# Altium PCB currentmode_buck.PCBDOC
Units mm, origin at the board's own origin, x right, y up, seen from the top; angles counter-clockwise.
Board outline 59.7 x 56.7 mm, 2 copper layers (TopLayer, BottomLayer); 40 components, 21 nets, 107 pads, 0 vias.
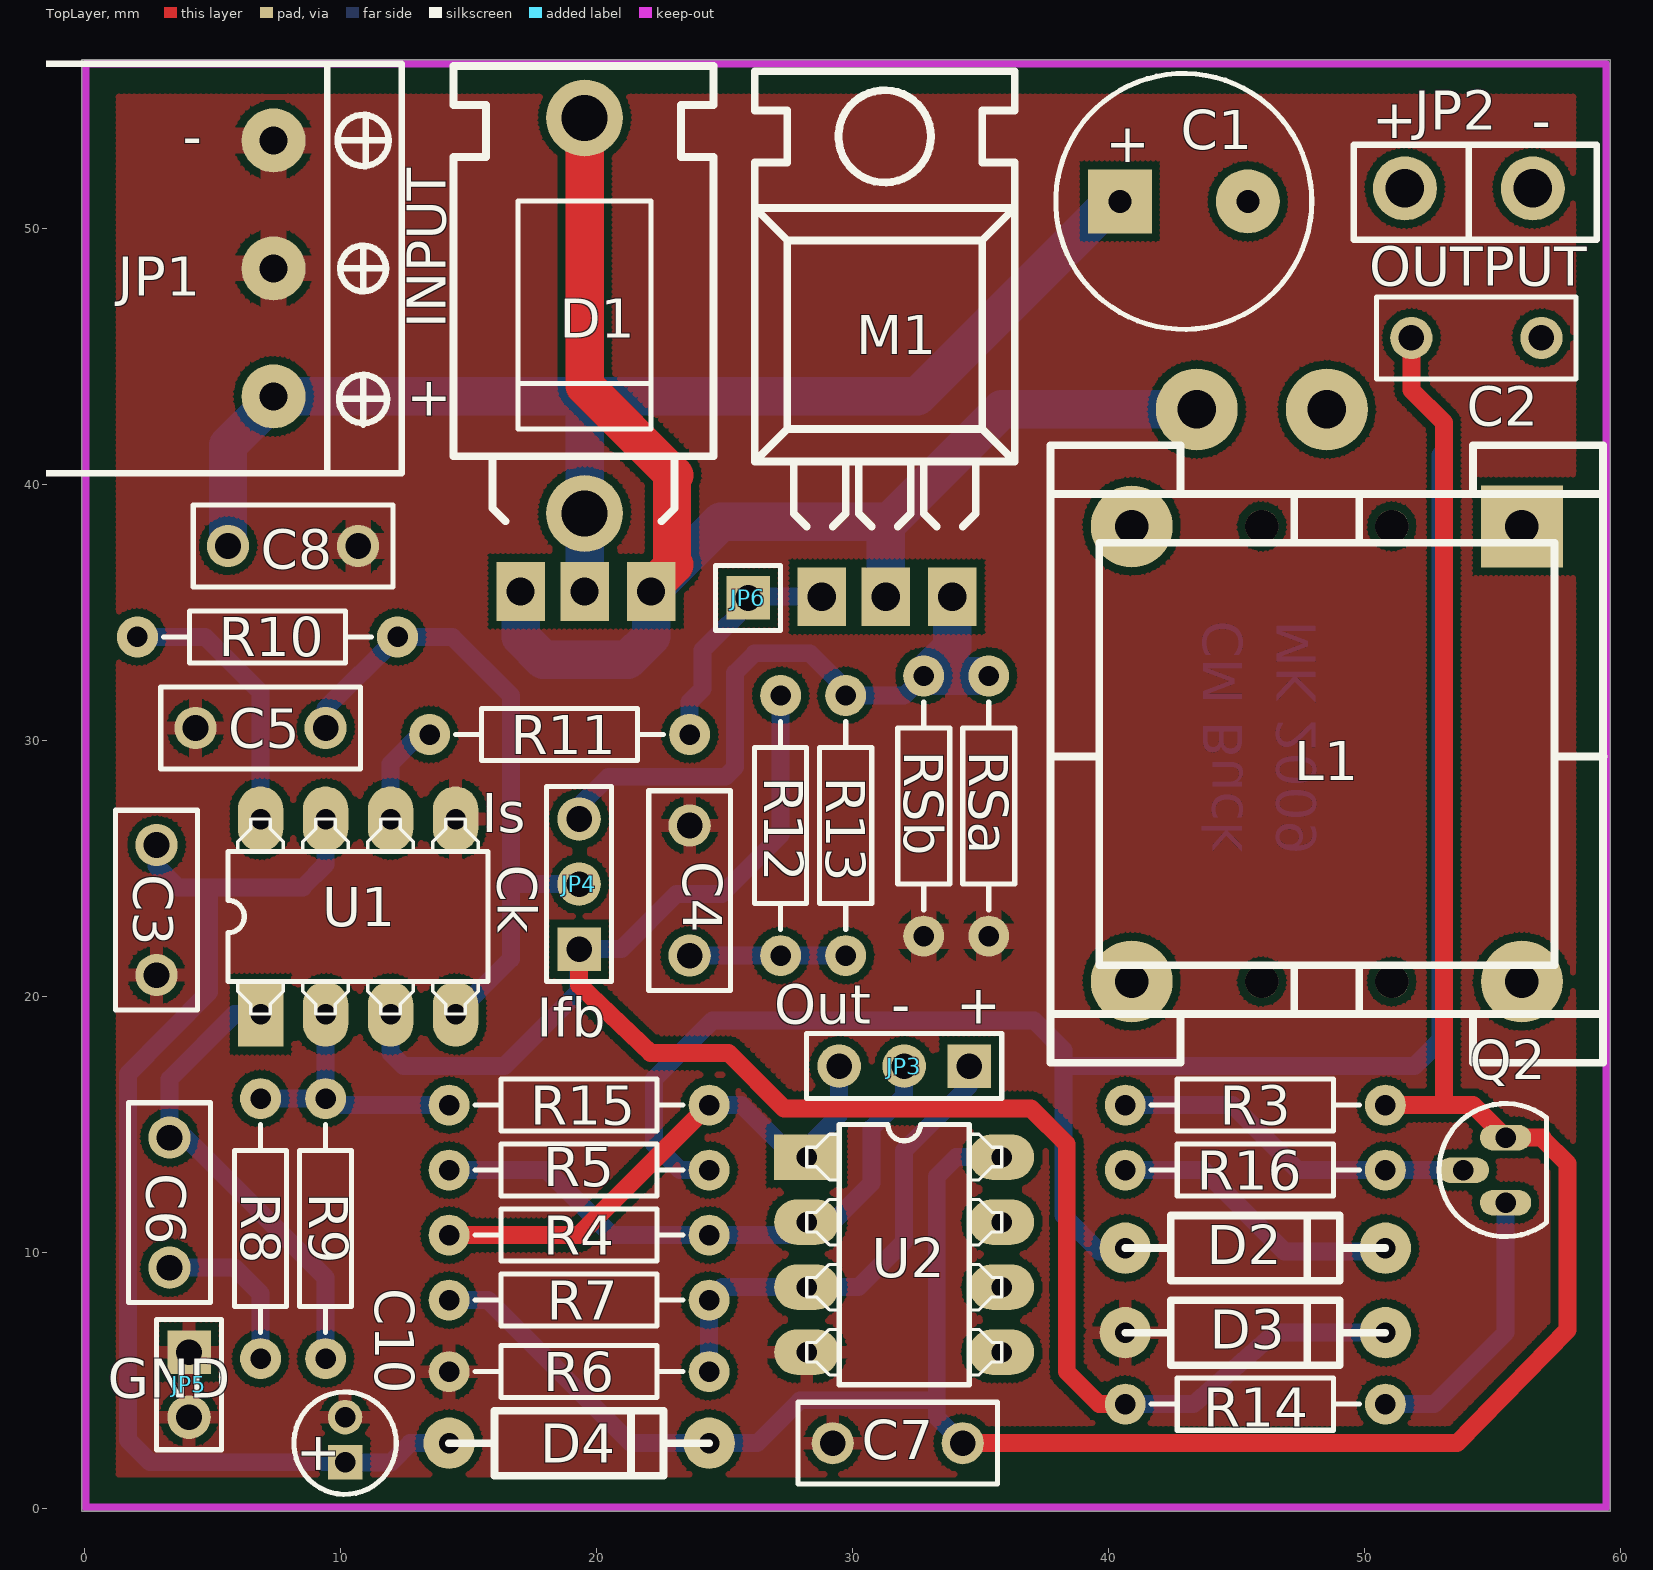
[diagram p0: TopLayer view]
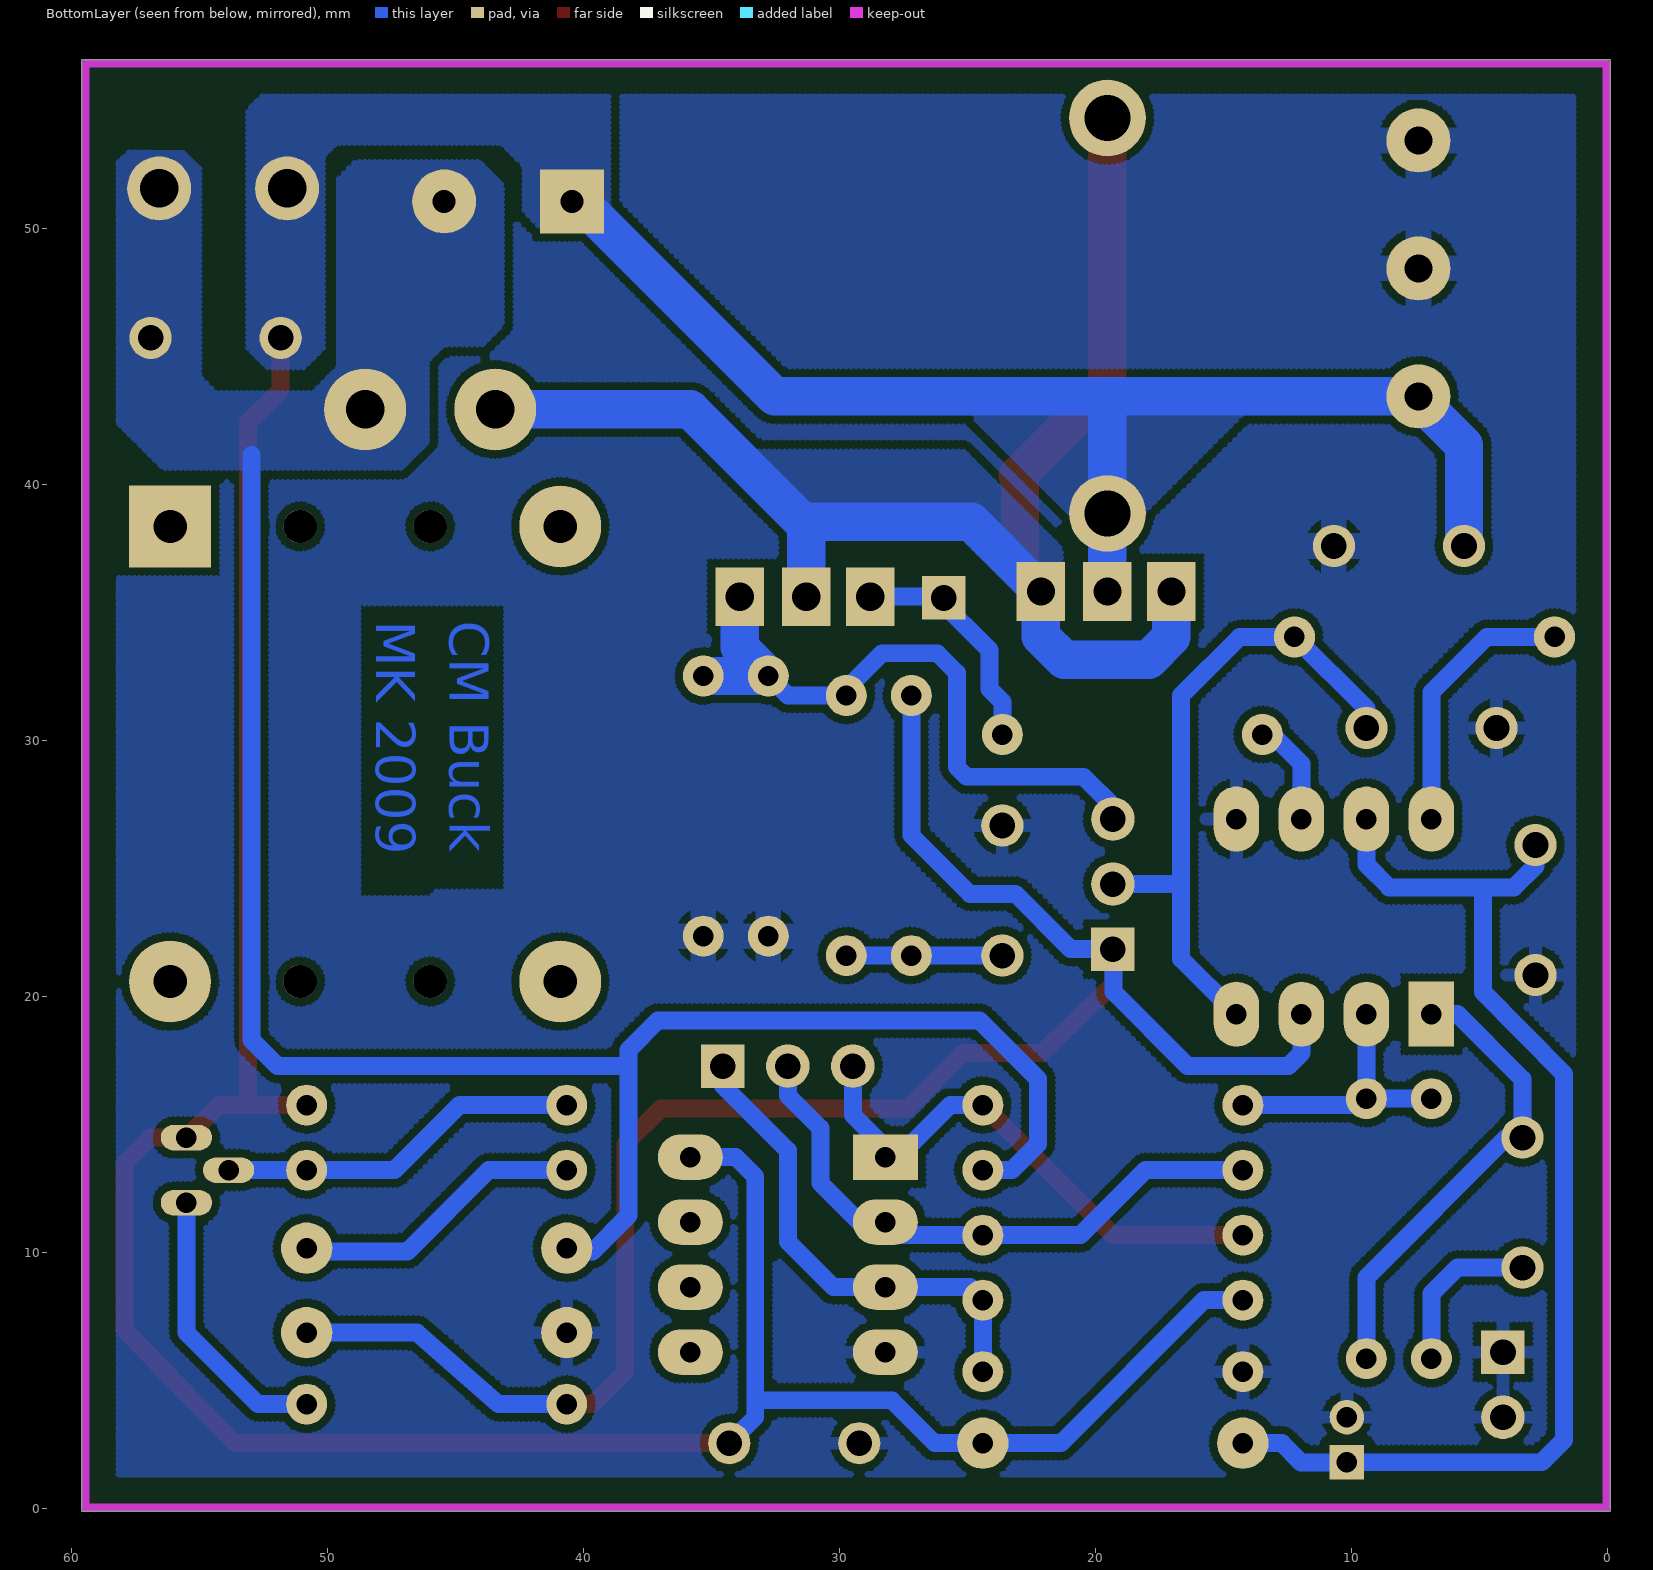
[diagram p1: BottomLayer view, seen from below]

## Layer stack, top to bottom
TopSolder: solder mask 0.0102, Solder Resist, Dk 3.5
TopLayer: signal copper 0.0356
Dielectric1: core 0.32, FR-4, Dk 4.8
BottomLayer: signal copper 0.0356
BottomSolder: solder mask 0.0102, Solder Resist, Dk 3.5

## Board outline
-0.12,-0.12 59.58,-0.12 59.58,56.58 -0.12,56.58

## Design rules (kind name [scope] priority, off if disabled: settings)
Clearance Edge_Clearance [OnLayer('KeepOutLayer') vs (OnLayer('BottomLayer') OR OnLayer('TopLayer'))] p1: gap=1.016 ignorepadtopadclearanceinfootprint=FALSE except(0: Arc-Hole Track-Hole SMDPad-Hole THPad-Hole Via-Hole Fill-Hole Poly-Hole Region-Hole Text-Hole)
Clearance [All] p2: gap=0.305 ignorepadtopadclearanceinfootprint=FALSE except(0: Arc-Hole Track-Hole SMDPad-Hole THPad-Hole Via-Hole Fill-Hole Poly-Hole Region-Hole Text-Hole)
FabricationTestPointUsage TestPointUsage [All] p1: valid=0 allowmultiple=FALSE
FabricationTestpoint Testpoint [All] p1: side=3 testpointundercomponent=TRUE minsize=1.016 maxsize=2.54 preferedsize=1.524 minholesize=0.508 maxholesize=1.016 preferedholesize=0.813 testpointgrid=0.025 allowsidetop=TRUE allowsidebottom=TRUE usegrid=TRUE gridtolerance=0
PolygonConnect DirectConnects [InNet('VOUT') OR InNet('VOUTGND') or InNet(NetD1_A)] p1: connectstyle=Direct reliefconductorwidth=0.254 reliefentries=4 polygonreliefangle="90 Angle" airgapwidth=0.254
PolygonConnect ThickThermals [(InComponent('JP1') OR InComponent('JP2') OR InComponent('C1') OR InComponent('C2') OR InComponent('C8') OR InComponent('RSa') OR InComponent('RSb'))] p2: connectstyle=Relief reliefconductorwidth=1 reliefentries=4 polygonreliefangle="90 Angle" airgapwidth=0.254
PolygonConnect [All] p3: connectstyle=Relief reliefconductorwidth=0.5 reliefentries=4 polygonreliefangle="90 Angle" airgapwidth=0.254
RoutingVias [All] p1: holewidth=0.711 width=1.27 viastyle="Through Hole" minholewidth=0.711 minwidth=1.27 maxholewidth=0.711 maxwidth=1.27
SilkToSolderMaskClearance SilkscreenOverComponentPads [IsPad] p1: minsilkscreentomaskgap=0.254 clearancetoexposedcopper=TRUE
SolderMaskExpansion [All] p1: expansion=0.102 istentingtop=FALSE
Width [All] p1: maxlimit=1.75 minlimit=0.25 preferedwidth=0.7
27 further rules are at their usual default settings.

## Components (designator, comment, footprint, x,y, rotation, side; value= is the part's Value field where it differs from the comment)
C1 "Cap Pol2" CAPPR5-5X5 42.926,51.054 r0 top value=C
C2 "Cap" CAPR5.08-7.8X3.2 54.356,45.72 r180 top value=C
C3 "Cap" CAPR5.08-7.8X3.2 2.794,23.368 r90 top value=100nF
C4 "Cap" CAPR5.08-7.8X3.2 23.622,24.13 r270 top value=C
C5 "Cap" CAPR5.08-7.8X3.2 6.858,30.48 r0 top value=C
C6 "Cap" CAPR5.08-7.8X3.2 3.302,11.938 r90 top value=C
C7 "Cap" CAPR5.08-7.8X3.2 31.75,2.54 r0 top value=100nF
C8 "Cap" CAPR5.08-7.8X3.2 8.128,37.592 r180 top value=100nF
C10 "Cap Pol1" CAPPR1.5-4X5 10.16,2.54 r90 top value=1uF
D1 "D" TO220_DIODE_COMB 17.018,35.814 r0 top
D2 "Vz" DIODE0.4 40.64,10.16 r0 top
D3 "Vz" DIODE0.4 40.64,6.858 r0 top
D4 "Z" DIODE0.4 14.224,2.54 r0 top
JP1 "Input" CON3_FEM 7.366,43.434 r90 top
JP2 "Output" WIDEHEADER2 51.562,51.562 r0 top
JP3 "TPA" HDR1X3 34.544,17.272 r180 top
JP4 "TPB" HDR1X3 19.304,21.844 r90 top
JP5 "Ground" HDR1X2 4.064,6.096 r270 top
JP6 "Gate" HDR1X1 25.908,35.56 r0 top
L1 "Inductor Iron" efd20 56.134,38.354 r270 top value=L
M1 "Q" SOT_78_H 28.782,35.61 r0 top
Q2 "BC557" 29-04 53.848,13.208 r0 top
R3 "Res2" AXIAL-0.4 45.72,15.748 r0 top value=R
R4 "Res2" AXIAL-0.4 19.304,10.668 r180 top value=R
R5 "Res2" AXIAL-0.4 19.304,13.208 r180 top value=R
R6 "Res2" AXIAL-0.4 19.304,5.334 r0 top value=R
R7 "Res2" AXIAL-0.4 19.304,8.128 r180 top value=R
R8 "Res2" AXIAL-0.4 6.858,10.922 r270 top value=R
R9 "Res2" AXIAL-0.4 9.398,10.922 r270 top value=R
R10 "Res2" AXIAL-0.4 7.13,34.036 r180 top value=R
R11 "Res2" AXIAL-0.4 18.542,30.226 r0 top value=R
R12 "Res2" AXIAL-0.4 27.178,26.67 r90 top value=R
R13 "Res2" AXIAL-0.4 29.718,26.67 r270 top value=R
R14 "Res2" AXIAL-0.4 45.72,4.064 r0 top value=R
R15 "Res2" AXIAL-0.4 19.304,15.748 r180 top
R16 "Res2" AXIAL-0.4 45.72,13.208 r0 top value=R
RSa "Res2" AXIAL-0.4 35.306,27.432 r90 top value=R
RSb "Res2" AXIAL-0.4 32.766,27.432 r90 top value=R
U1 "UC3843" DIP8 6.858,19.304 r90 top
U2 "LM358N" DIP8 28.194,13.716 r0 top

## Footprints (in the part's own frame and the unit in brackets; to place one, negate y for a bottom-side part, rotate by r counter-clockwise, add the part's x,y. Pads: shape width x height; smd on the part's side, far side on the other; paste and mask are expansions set on the pad)
29-04 [mm]
  oval 2x1 hole 0.8: 1(1.651,-1.27) 2(0,0) 3(1.651,1.27)
  silkscreen extent -0.95,-2.6 3.25,2.6
AXIAL-0.4 [mm]
  round 1.6 hole 0.8: 1(-5.08,0) 2(5.08,0)
  silkscreen extent -4.06,-1.02 4.06,1.02
CAPPR1.5-4X5 [mm]
  rect 1.35x1.35 hole 0.8: 1(-0.75,0)
  round 1.35 hole 0.8: 2(1.016,0)
  silkscreen extent -2,-2 2,2
CAPPR5-5X5 [mm]
  rect 2.5x2.5 hole 0.9: 1(-2.5,0)
  round 2.5 hole 0.9: 2(2.5,0)
  silkscreen extent -5,-5 5,5
CAPR5.08-7.8X3.2 [mm]
  round 1.65 hole 1: 1(-2.54,0) 2(2.54,0)
  silkscreen extent -3.9,-1.6 3.9,1.6
CON3_FEM [mm]
  round 2.5 hole 1.1: 1(0,0) 2(5,0) 3(10,0)
  silkscreen extent -3,-5 13,10
DIODE0.4 [mil]
  round 79 hole 31.5: A(0,0) K(400,0)
  silkscreen extent 0,-50 400,50
DIP8 [mm]
  rect 2.54x1.778 hole 0.8: 1(0,0)
  oval 2.54x1.778 hole 0.8: 2(0,-2.54) 3(0,-5.08) 4(0,-7.62) 5(7.62,-7.62) 6(7.62,-5.08) 7(7.62,-2.54) 8(7.62,0)
  silkscreen extent 0,-8.89 7.62,1.27
efd20 [mm]
  rect 3.2x3.2 hole 1.3: 1(0,0)
  round 1.3 hole 1.3 unplated: 1(0,-5.08) 1(0,-10.16) 1(17.78,-5.08) 1(17.78,-10.16)
  round 3.2 hole 1.5: 2(-4.572,-7.62) 4(-4.572,-12.7)
  round 3.2 hole 1.3: 3(17.78,0) 5(17.78,-15.24) 6(0,-15.24)
  silkscreen extent -3.18,-18.41 20.96,3.2
HDR1X1 [mm]
  rect 1.7x1.7 hole 1: 1(0,0)
  silkscreen extent -1.27,-1.27 1.27,1.27
HDR1X2 [mm]
  rect 1.7x1.7 hole 1: 1(0,0)
  round 1.7 hole 1: 2(2.54,0)
  silkscreen extent -1.27,-1.27 3.81,1.27
HDR1X3 [mm]
  rect 1.7x1.7 hole 1: 1(0,0)
  round 1.7 hole 1: 2(2.54,0) 3(5.08,0)
  silkscreen extent -1.27,-1.27 6.35,1.27
SOT_78_H [mm]
  rect 1.9x2.3 hole 1.1: D(2.5,0) G(0,0) S(5.1,0)
  silkscreen extent -2.62,2.74 7.54,20.52
TO220_DIODE_COMB [mm]
  rect 1.9x2.3 hole 1.1: A(0,0) A(5.1,0) K(2.5,0)
  round 3 hole 1.8: A(2.5,18.498) K(2.5,3.048)
  silkscreen extent -2.62,2.74 7.54,20.52
WIDEHEADER2 [mm]
  round 2.5 hole 1.5: 1(0,0) 2(5,0)
  silkscreen extent -2,-2 7.5,1.7

## Part data
C1: "Polarized Capacitor (Axial)", Published=8-Jun-2000, Publisher="Altium Limited", Revision="July-2002: Re-released for DXP Platform."
C2 C3 C4 C5 C6 C7 C8: "Capacitor", Published=8-Jun-2000, Publisher="Altium Limited", Revision="July-2002: Re-released for DXP Platform."
C10: "Polarized Capacitor (Radial)", Published=8-Jun-2000, Publisher="Altium Limited", Revision="July-2002: Re-released for DXP Platform."
D1: library part DIODE, "Diode"
D2 D3 D4: library part ZENER, "Zener diode"
JP1 JP3 JP4: library part "Header 3", "Header, 3-Pin", Publisher="Altium Limited", Revision="17-Jul-2002: Re-released for DXP Platform."
JP2 JP5 JP6: library part "Header 2", "Header, 2-Pin", Publisher="Altium Limited", Revision="17-Jul-2002: Re-released for DXP Platform."
L1: "Magnetic-Core Inductor", Published=24-Mar-1999, Publisher="Altium Limited", Revision="July-2002: Re-released for DXP Platform."
M1: library part BUK7560, "N-Channel MOSFET"
Q2: library part BC558B, "Amplifier Transistor PNP Silicon", Package Information="Latest Revision: 1996", Package Reference=29-04, Datasheet="Small Signal Transistors, FETs and Diodes, DL126 Rev3 (1991)", Published=29-Sep-2000, Publisher="Altium Limited", Revision="17-Jul-2002: Re-released for DXP Platform."
R3 R4 R5 R6 R7 R8 R9 R10 R11 R12 R13 R14 R15 R16 RSa RSb: "Resistor"
  R3 R4 R5 R6 R7 R8 R9 R10 R11 R12 R13 R14 R16 RSa RSb: Published=8-Jun-2000, Publisher="Altium Limited", Revision="July-2002: Re-released for DXP Platform."
U1: library part SG3842, "Current mode PWM Generator"
U2: "Single-Supply Dual Operational Amplifier", Package Information="Latest Revision: 1998", Package Reference=626-05, Datasheet="Latest Revision: Jan-2002, Rev. 7", Published=28-Feb-2003, Publisher="Altium Limited"

## Nets (pads, with @x,y where several pads share a name; then routed paths per layer and width w, separated by ;. In a path a pad name is that pad's centre, name@x,y a point inside that pad or via, vN(x,y) a via of type N, cw(c..) or ccw(c..) an arc to the next point about the centre after c; other vN are vias at no path point)
CLOCK: C5.2 JP4.2 R10.1 U1.4 | length 26.1
  BottomLayer w0.7: C5.2 9.398,31.242 R10.1 14.351,34.036 16.637,31.75 16.637,21.463 U1.4 ; 16.637,24.384 JP4.2
CUR_FB: D3.K JP4.1 R12.2 R14.1 U1.3 | length 73
  TopLayer w0.7: JP4.1@19.304,21.717 19.304,20.447 22.098,17.78 25.146,17.78 27.305,15.621 36.957,15.621 38.354,14.224 38.354,5.334 39.624,4.064 R14.1
  BottomLayer w0.7: U1.3 11.938,17.78 12.446,17.272 16.383,17.272 19.286,20.175 19.286,21.826 JP4.1 20.955,21.844 23.114,24.003 24.892,24.003 27.178,26.289 R12.2 ; R14.1@40.513,4.064 43.307,4.064 46.482,6.858 D3.K
CUR_SENS: JP4.3 M1.S R13.1 RSa.2 RSb.2 | length 25.8
  BottomLayer w0.7: JP4.3 19.304,27.432 20.447,28.575 25.019,28.575 25.4,28.956 25.4,32.639 26.162,33.401 28.321,33.401 29.718,32.004 R13.1 32.004,31.75 RSb.2
  BottomLayer w1.5: M1.S 33.882,33.628 RSb.2 RSa.2
DIF_NEG: JP3.2 R4.1 R5.2 U2.2 | length 22.5
  BottomLayer w0.7: R5.2 18.034,13.208 20.574,10.668 27.686,10.668 U2.2 ; U2.2@29.21,11.176 30.734,12.7 30.734,14.859 32.004,16.129 JP3.2
DIF_OUT: JP3.3 R4.2 R15.1 U2.1 | length 21
  TopLayer w0.7: R4.2 19.304,10.668 R15.1
  BottomLayer w0.7: R15.1 25.654,15.748 27.686,13.716 U2.1 28.194,14.097 29.464,15.367 JP3.3
DIF_POS: JP3.1 R6.2 R7.1 U2.3 | length 19.5
  BottomLayer w0.7: R6.2 R7.1@24.384,8.382 ; R7.1 24.892,8.636 30.226,8.636 32.004,10.414 32.004,13.97 34.544,16.51 JP3.1
GATE: JP6.1 M1.G R11.2 | length 9
  BottomLayer w0.7: R11.2 23.622,31.496 24.13,32.004 24.13,33.528 26.212,35.61 M1.G
GND: C3.1 C4.1 C5.1 C7.1 C8.1 C10.2 D3.A JP1.2 JP1.3 JP5.1 JP5.2 R6.1 RSa.1 RSb.1 U1.5 U2.4 | length 0.4
  TopLayer w0.7: C4.1 C4.1@23.622,27.051
NetC3_2: C3.2 C10.1 D4.A U1.7 | length 46
  BottomLayer w0.7: C3.2 2.794,25.095 3.632,24.257 8.509,24.257 9.398,25.146 U1.7 ; 4.851,24.257 4.851,20.168 1.676,16.967 1.676,2.667 2.54,1.803 C10.1 11.95,1.79 12.7,2.54 D4.A
NetC4_2: C4.2 R12.1 R13.2 | length 6.1
  BottomLayer w0.7: C4.2 R13.2
NetC6_1: C6.1 R8.2 | length 6.5
  BottomLayer w0.7: C6.1 5.842,9.398 6.858,8.382 R8.2
NetC6_2: C6.2 R9.2 U1.1 | length 18.2
  BottomLayer w0.7: 3.302,16.764 C6.2 3.937,14.478 9.398,9.017 R9.2 ; 3.429,16.891 5.842,19.304 U1.1
NetD1_A: D1.A L1.4 M1.D | length 57.3
  TopLayer w1.5: D1.A@17.018,35.814 D1.A@17.018,36.195 ; D1.A@19.518,54.312 19.518,43.855 23.014,40.359 ; D1.A@22.118,35.814 22.118,35.961 D1.A@23.014,36.857 ; D1.A@22.933,36.936 22.933,40.439
  BottomLayer w1.5: D1.A@17.018,35.814 17.018,34.036 17.907,33.147 21.209,33.147 22.118,34.056 22.118,35.814 24.838,38.534 31.422,38.534 ; M1.D 31.282,38.394 35.814,42.926 L1.4
NetD2_K: D2.K R16.1 | length 11.2
  BottomLayer w0.7: R16.1 43.688,13.208 46.863,10.033 D2.K@50.546,10.033
NetQ2_1: Q2.1 R14.2 | length 10.9
  BottomLayer w0.7: R14.2 52.705,4.064 55.499,6.858 Q2.1
NetQ2_2: Q2.2 R3.1 R16.2 | length 14.3
  BottomLayer w0.7: R3.1 44.831,15.748 47.371,13.208 Q2.2
NetR8_1: R8.1 R9.1 R15.2 U1.2 | length 10.8
  BottomLayer w0.7: R8.1 R9.1 ; U1.2 R9.1 ; R15.2 9.652,15.748 R9.1
NetR10_2: R10.2 U1.8 | length 10.7
  BottomLayer w0.7: R10.2 4.699,34.036 6.858,31.877 U1.8
NetR11_1: R11.1 U1.6 | length 4.2
  BottomLayer w0.7: U1.6 11.938,29.083 13.081,30.226 R11.1
VOUT: C1.1 C2.2 C7.2 C8.2 D1.K D4.K JP1.1 JP2.1 Q2.3 R3.2 R7.2 U2.8 | length 157.2
  TopLayer w0.7: C7.2 53.594,2.54 57.912,6.96 57.912,13.462 56.947,14.427 ; R3.2 54.229,15.748 Q2.3 56.947,14.478 ; C2.2 51.816,43.688 53.086,42.418 53.086,15.748
  BottomLayer w0.7: JP1.1@7.366,43.307 JP1.1 ; R7.2 15.748,8.128 21.336,2.54 26.264,2.54 27.94,4.216 33.274,4.216 ; C7.2@34.417,2.413 33.274,3.556 33.274,12.954 34.036,13.716 U2.8 ; JP2.1 JP2.1@51.943,51.562
  BottomLayer w1.5: C8.2 5.588,41.529 JP1.1@7.366,43.307 ; JP1.1 32.512,43.434 C1.1@40.279,51.201 ; D1.K@19.518,35.814 19.518,43.394 ; D1.K@19.518,39.029 D1.K@19.558,39.069
VOUTGND: C1.2 C2.1 D2.A JP2.2 L1.2 R5.1 | length 69.8
  BottomLayer w0.7: R5.1 23.241,13.208 22.225,14.224 22.225,16.764 24.511,19.05 37.084,19.05 38.227,17.907 38.227,11.43 39.624,10.033 D2.A@40.386,10.033 ; 38.227,17.272 51.943,17.272 52.959,18.288 52.959,41.148
pads on no net: L1.1 L1.3 L1.5 L1.6 U2.5 U2.6 U2.7

## Polygon pours and split planes (outlines as drawn)
GND on TopLayer "TopLayer-GND" (hatched 90Degree grid 0.2 track 0.25, remove dead copper, pour order 1000): 0.178,56.549 59.487,56.549 59.487,0.161 0.178,0.161
VOUTGND on BottomLayer "BottomLayer-VOUTGND" (hatched 90Degree grid 0.2 track 0.25, remove dead copper, pour order 1005): 43.18,51.689 44.069,52.578 48.895,52.578 49.53,51.943 49.53,44.577 50.546,43.561 54.356,43.561 54.991,44.196 54.991,52.324 55.626,52.93 57.73,52.959 58.42,52.324 58.42,42.672 56.388,40.64 47.117,40.64 46.101,41.656 46.101,44.831 45.466,45.466 43.942,45.466 43.18,46.228
VOUT on BottomLayer "BottomLayer-VOUT 1" (hatched 90Degree grid 0.2 track 0.25, remove dead copper, pour order 1004): 39.025,49.947 39.025,55.372 39.497,55.88 51.816,55.88 53.086,54.61 53.086,45.339 52.324,44.577 50.927,44.577 50.165,45.339 50.17,52.827 49.657,53.34 43.18,53.34 42.291,52.451 42.291,50.673 41.656,50.038 39.025,50.038
VOUT on BottomLayer "BottomLayer-VOUT" (hatched 90Degree grid 0.2 track 0.25, remove dead copper, pour order 1003): 20.955,38.862 18.161,38.862 14.097,42.926 14.986,43.434 23.749,43.434 24.765,42.672
NetD1_A on BottomLayer "BottomLayer-NetD1_A" (hatched 90Degree grid 0.2 track 0.25, remove dead copper, pour order 1002): 22.86,35.687 21.336,35.687 21.336,37.465 25.146,41.275 34.518,41.275 31.643,38.4 25.634,38.4
GND on BottomLayer "BottomLayer-GND" (hatched 90Degree grid 0.2 track 0.25, remove dead copper, pour order 1001): 0,56.515 59.436,56.515 59.436,0 0,0

## Keep-outs
KeepOutLayer:
  lines w0.3: 0.03,0.03 59.43,0.03 59.43,56.43 0.03,56.43 0.03,0.03

## Other copper
BottomLayer:
  text "CM Buck" at 45.212,34.671 h1.52 r90
  text "MK 2009" at 48.09,34.671 h1.52 r90

## Silkscreen, mask and mechanical layers (free items; w line width, h text height)
TopOverlay:
  text "+" at 50.292,53.53 h1.52
  text "-" at 56.515,53.467 h1.52
  text "-" at 3.81,52.832 h1.52
  text "OUTPUT" at 50.165,47.752 h1.52
  text "INPUT" at 14.097,46.101 h1.52 r90
  text "+" at 12.573,42.672 h1.52
  text "Is" at 15.494,26.416 h1.52
  text "Ck" at 16.129,25.146 h1.52 r270
  text "Out" at 26.924,18.923 h1.52
  text "-" at 31.496,18.923 h1.52
  text "+" at 34.036,18.923 h1.52
  text "Ifb" at 17.653,18.415 h1.52
  text "GND" at 0.889,4.318 h1.52

## Text inside footprints (layer, text, board x,y; h text height)
C1: TopOverlay "+" at 39.878,52.578 h1.5
C10: TopOverlay "+" at 9.779,1.27 h1.5 r90